# Altium PCB PCB_3.PcbDoc
Units mil, origin at the board's own origin, x right, y up, seen from the top; angles counter-clockwise.
Board outline 3445 x 3715 mil, 2 copper layers (Top Layer, Bottom Layer); 29 components, 23 nets, 136 pads, 1 vias.
Unrouted connection lines stored in the file: 3.
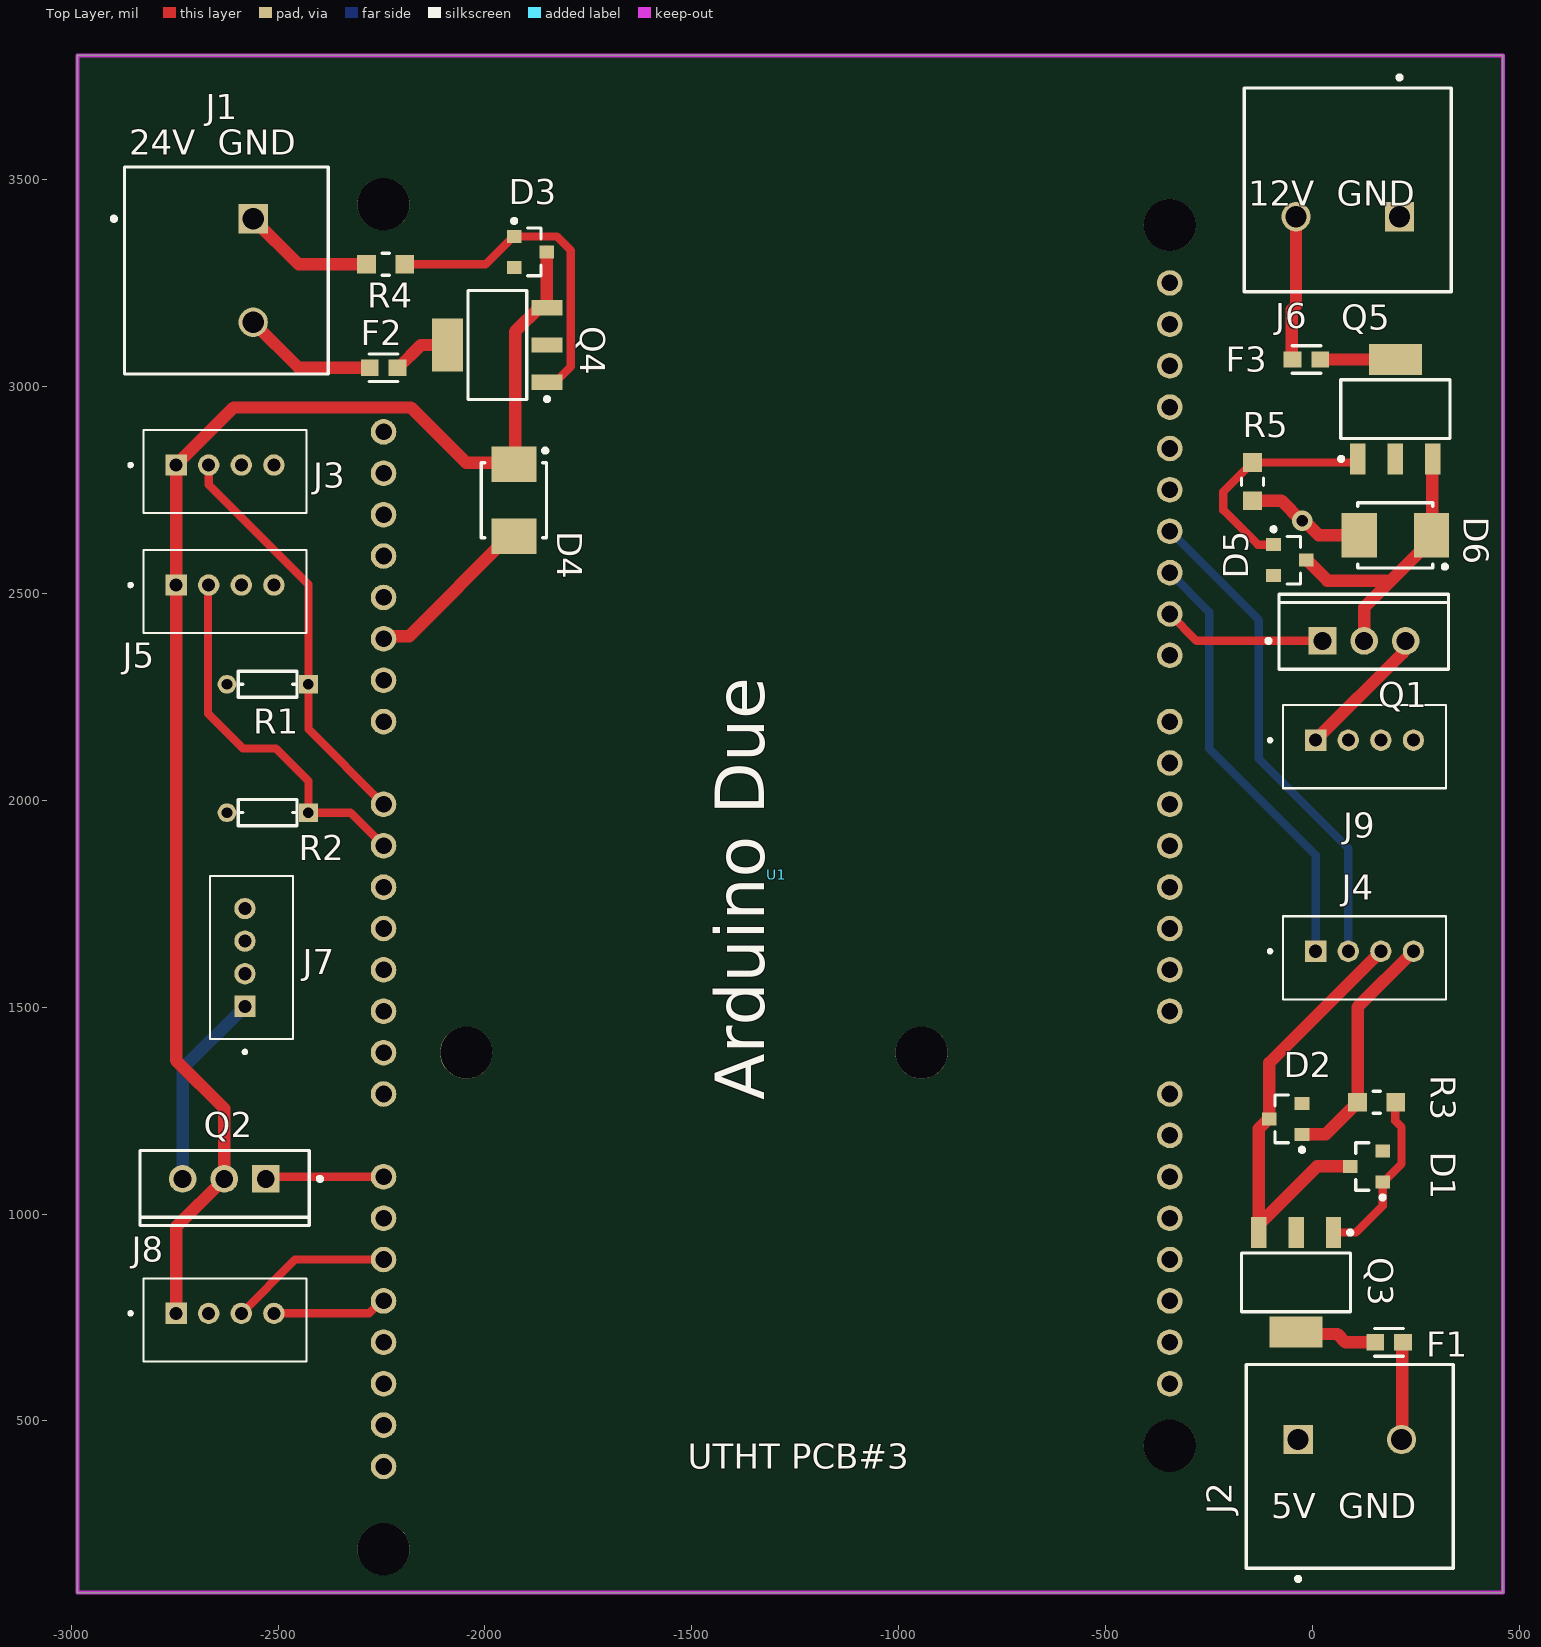
[diagram p0: Top Layer view]
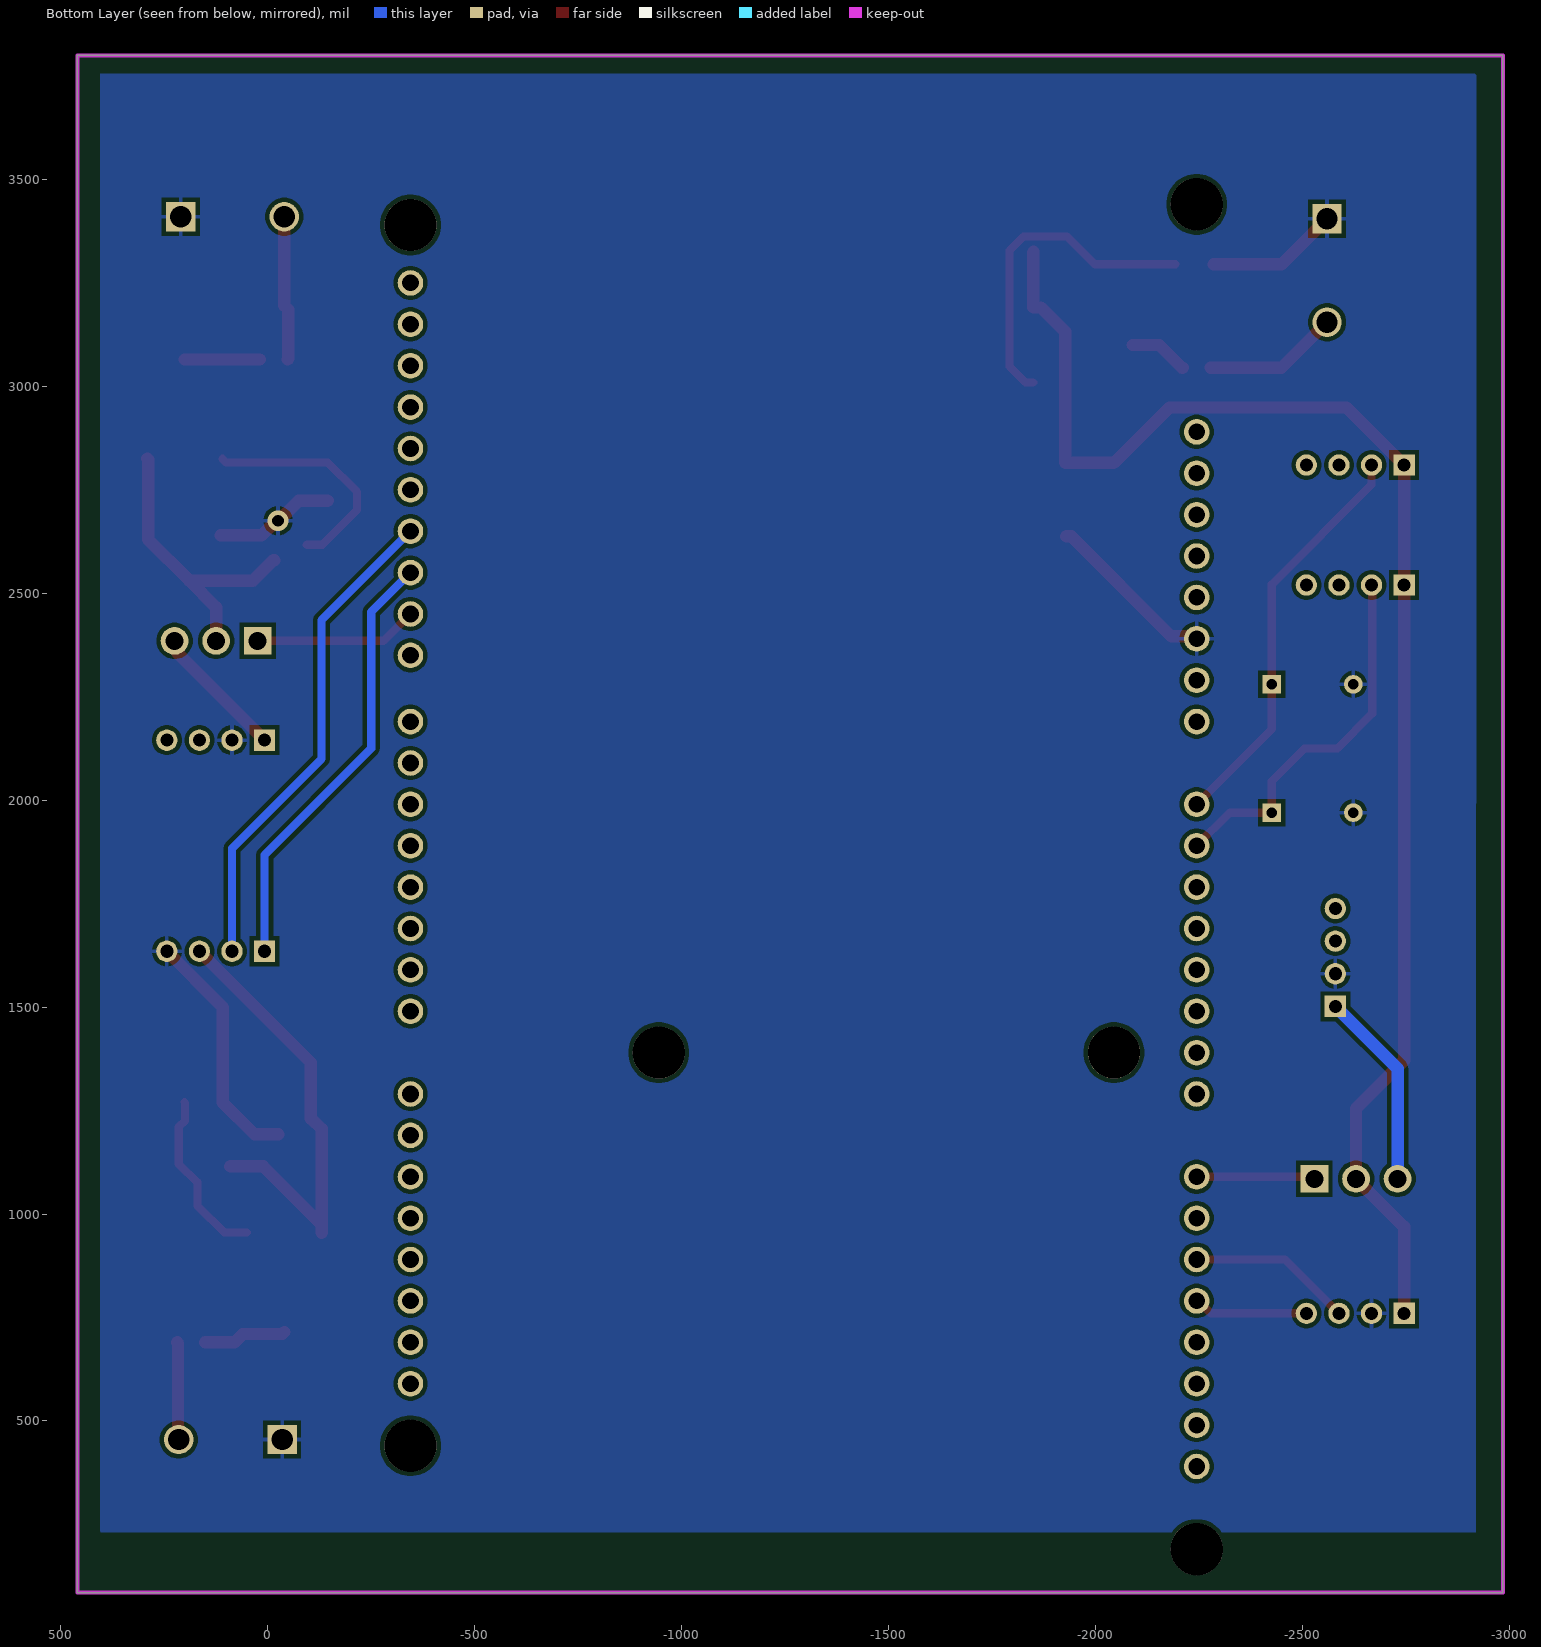
[diagram p1: Bottom Layer view, seen from below]

## Layer stack, top to bottom
Top Solder: solder mask 0.4, Solder Resist, Dk 3.5
Top Layer: signal copper 1.4
Dielectric 1: dielectric 12.6, FR-4, Dk 4.8
Bottom Layer: signal copper 1.4
Bottom Solder: solder mask 0.4, Solder Resist, Dk 3.5

## Board outline
-2985,85 460,85 460,3800 -2985,3800

## Design rules (kind name [scope] priority, off if disabled: settings)
Clearance [All] p1: gap=10 ignorepadtopadclearanceinfootprint=FALSE except(0: Arc-Hole Track-Hole SMDPad-Hole THPad-Hole Via-Hole Fill-Hole Poly-Hole Region-Hole Text-Hole; 12.99: Arc-THPad Track-THPad; 19.68: THPad-THPad)
PolygonConnect [All] p1: connectstyle=Relief reliefconductorwidth=10 reliefentries=4 polygonreliefangle="90 Angle" airgapwidth=10
RoutingVias [All] p1: holewidth=28 width=50 viastyle="Through Hole" minholewidth=28 minwidth=50 maxholewidth=28 maxwidth=50
SolderMaskExpansion [All] p1: expansion=4 istentingtop=FALSE
Width Width_Power [(InNet('5V') OR InNet('12V') OR InNet('24V') OR InNet('GND') OR InNet('NetJ7_1') OR InNet('NetJ8_1')) OR (InNet('NetF1_1') OR InNet('NetF1_2') OR InNet('NetF2_1') OR InNet('NetF2_2') OR InNet('NetF3_1') OR InNet('NetF3_2'))] p1: maxlimit=50 minlimit=30 preferedwidth=40
Width Width_1 [All] p2: maxlimit=23.62 minlimit=10 preferedwidth=10 minimp=50.000000 maximp=50.000000 favimp=50.000000
30 further rules are at their usual default settings.

## Classes and differential pairs
component class "Protection Circuit 5V": D1 D2 F1 Q3 R3
component class "Protection Circuit 12V": D1 D2 F1 Q4 R5
component class "Protection Circuit 24V": D1 D2 F1 M1 Q4 R5
component class PCB_3: J2 J3 J6 J8 J9 Q1 Q2 R2 U1

## Components (designator, comment, footprint, x,y, rotation, side; value= is the part's Value field where it differs from the comment)
D1 "Zener" ONSC-SOT-23-3-318-08_V 130,1115 r180 top
D2 "Zener" ONSC-SOT-23-3-318-08_V -65,1230 r180 top
D3 "Zener 1" ONSC-SOT-23-3-318-08_V -1890,3325 r0 top
D4 "Zener 2" ONSC-SMB-2-403A-03_H_V -1930,2725 r270 top
D5 "Zener" ONSC-SOT-23-3-318-08_V -55,2580 r0 top
D6 "Zener" ONSC-SMB-2-403A-03_H_V 200,2640 r180 top
F1 "1A Fuse" FP-0603SFS-MFG 185,690 r180 top value=0.2Ω
F2 "1A Fuse" FP-0603SFS-MFG -2245,3045 r0 top value=0.2Ω
F3 "1A Fuse" FP-0603SFS-MFG -15,3065 r0 top value=0.2Ω
J1 "Screw Conn." PHOE-1714955_V -2560,3280 r270 top
J2 "Screw Conn." PHOE-1714955_V 90,455 r0 top
J3 "4 Pin GROVE, RTD #1" SEEED_110990030 -2628.11,2520 r0 top
J4 "4 Pin GROVE, CAN" SEEED_110990030 125.63,1635 r0 top
J5 "4 Pin GROVE, RTD #2" SEEED_110990030 -2628.11,2810 r0 top
J6 "Screw Conn." PHOE-1714955_V 85,3410 r180 top
J7 "4 PIN GROVE, RELAY" SEEED_110990030 -2580,1620 r90 top
J8 "4 PIN GROVE, FLOW" SEEED_110990030 -2628.11,760 r0 top
J9 "4 PIN GROVE, SOL" SEEED_110990030 125.63,2145 r0 top
Q1 "STP80NF55-06" STM-TO-220A-3 124.61,2385 r90 top
Q2 "STP80NF55-06" STM-TO-220A-3 -2630,1085 r270 top
Q3 "PMOS" FAIR-SOT223-4_V -40,835 r270 top
Q4 "PMOS" FAIR-SOT223-4_V -1970,3100 r180 top
Q5 "PMOS" FAIR-SOT223-4_V 200,2945 r90 top
R1 "" FP-MBA0204-MFG -2525,2280 r180 top value=220Ω
R2 "" FP-MBA0204-MFG -2525,1970 r180 top value=220Ω
R3 "100 kOhm" FP-CR0805-MFG 155,1270 r0 top
R4 "100 kOhms" FP-CR0805-MFG -2240,3295 r0 top
R5 "100 kOhm" FP-CR0805-MFG -145,2770 r90 top
U1 "DUE_CONNECTOR" DUE_FOOTPRINT -2245,2890 r0 top

## Footprints (in the part's own frame and the unit in brackets; to place one, negate y for a bottom-side part, rotate by r counter-clockwise, add the part's x,y. Pads: shape width x height; smd on the part's side, far side on the other; paste and mask are expansions set on the pad)
DUE_FOOTPRINT [mm]
  round 1.57 hole 1.02: 0(0,0) 1(0,-2.54) 2(0,-5.08) 3(0,-7.62) 4(0,-10.16) 5(0,-12.7) 6(0,-15.24) 7(0,-17.78) 8(0,-22.86) 9(0,-25.4) 10(0,-27.94) 11(0,-30.48) 12(0,-33.02) 13(0,-35.56) 14(0,-38.1) 15(0,-40.64) 16(0,-45.72) 17(0,-48.26) 18(0,-50.8) 19(0,-53.34) 20(0,-55.88) 21(0,-58.42) 22(0,-60.96) 23(0,-63.5) 24(48.26,-58.42) 25(48.26,-55.88) 26(48.26,-53.34) 27(48.26,-50.8) 28(48.26,-48.26) 29(48.26,-45.72) 30(48.26,-43.18) 31(48.26,-40.64) 32(48.26,-35.56) 33(48.26,-33.02) 34(48.26,-30.48) 35(48.26,-27.94) 36(48.26,-25.4) 37(48.26,-22.86) 38(48.26,-20.32) 39(48.26,-17.78) 40(48.26,-13.716) 41(48.26,-11.176) 42(48.26,-8.636) 43(48.26,-6.096) 44(48.26,-3.556) 45(48.26,-1.016) 46(48.26,1.524) 47(48.26,4.064) 48(48.26,6.604) 49(48.26,9.144)
  body extent -1.27,-64.77 49.53,10.41, height 9.5
FAIR-SOT223-4_V [mm] "SOT223, 4-Leads, Body 6.7x3.7mm, Pitch 2.3mm"
  rect 1.9x0.95 smd: 1(-3.05,2.3) 2(-3.05,0) 3(-3.05,-2.3)
  rect 1.9x3.25 smd: 4(3.05,0)
  silkscreen extent -3.17,-3.35 1.8,3.45, body extent -3.5,-3.35 3.5,3.35, height 1.8
FP-0603SFS-MFG [mil]
  rect 43x39 smd paste+0 mask+0: 1(-33.5,0) 2(33.5,0)
  silkscreen extent -34,-33 34,33, body extent -59,-23 59,23, height 10
FP-CR0805-MFG [mm]
  rect 1.15x1.15 smd paste+0 mask+0: 1(-1.175,0) 2(1.175,0)
  silkscreen extent -0.23,-0.67 0.23,0.67, body extent -1.85,-0.77 1.85,0.77, height 0.25
FP-MBA0204-MFG [mm]
  rect 1.15x1.15 hole 0.65 paste-1000 mask+0: 1(-2.5,0)
  round 1.15 hole 0.65 paste-1000 mask+0: 2(2.5,0)
  silkscreen extent -1.8,-0.8 1.8,0.8, body extent -3.17,-0.9 3.17,0.9, height 0.25
ONSC-SMB-2-403A-03_H_V [mil] "Molded, 2-Leads, Body 4.6x3.95mm"
  rect 85x107.99 smd: 1(-87.01,0) 2(87.01,0)
  silkscreen extent -125,-79 91,81, body extent -91,-78 91,78, height 95
ONSC-SOT-23-3-318-08_V [mm] "SOT23, 3-Leads, Body 2.92x1.3mm, Pitch 0.95mm"
  rect 0.9x0.8 smd: 1(-1,0.95) 2(-1,-0.95) 3(1,0)
  silkscreen extent -1.13,-1.46 0.65,2.02, body extent -0.65,-1.46 0.65,1.46, height 1.11
PHOE-1714955_V [mm] "Terminal Block, 2-Leads, Body 12.7x12.5mm, Pitch 6.35mm"
  rect 1.8x1.8 hole 1.3: 1(-3.175,0)
  round 1.8 hole 1.3: 2(3.175,0)
  silkscreen extent -6.35,-8.67 6.35,4.6, body extent -6.92,-7.9 6.35,4.6, height 21.51
SEEED_110990030 [mm]
  rect 1.308x1.308 hole 0.8: 1(-3,0)
  round 1.308 hole 0.8: 2(-1,0) 3(1,0) 4(3,0)
  silkscreen extent -5.9,-2.95 5,2.15, body extent -5,-2.92 5,2.08, height 8
STM-TO-220A-3 [mm] "FM, 3-Leads, Body 10.4x4.6mm, Pitch 2.55mm"
  rect 1.7x1.7 hole 1.1: 1(0,2.55)
  round 1.7 hole 1.1: 2(0,0) 3(0,-2.55)
  silkscreen extent -1.74,-5.18 2.86,6, body extent -1.74,-5.18 2.86,5.23, height 19.68

## Part data
D1 D3 D5: library part CMP-1060-01182-1, "Zener Voltage Regulator, 225 mW, 3-Pin SOT-23, Pb-Free, Tape and Reel", Manufacturer="On Semiconductor", PartNumber=MMBZ5245BLT3G, ComponentLink1Description="Manufacturer URL", ComponentLink1URL=http://www.onsemi.com/, ComponentLink2Description=Datasheet, ComponentLink2URL=http://www.onsemi.cn/pub_link/Collateral/MMBZ5221BLT1-D.PDF, ComponentLink3Description="Package Specification", ComponentLink3URL=http://www.onsemi.cn/pub_link/Collateral/318-08.PDF, DatasheetVersion="Rev. 12", Mounting Technology="Surface Mount", PackageDescription="3-Pin Small Outline Transistor, Body 2.92 x 1.3 mm, Pitch 0.95 mm", PackageReference=SOT-23-3-318-08, PackageVersion="Rev. AP, 11/2009", Packing="Tape and Reel", RoHS=Pb-Free, VZ Typ (V)=15
D2: library part CMP-1060-01193-1, "Zener Voltage Regulator, 225 mW, 3-Pin SOT-23, Pb-Free, Tape and Reel", Manufacturer="On Semiconductor", PartNumber=SZBZX84C39ET1G, ComponentLink1Description="Manufacturer URL", ComponentLink1URL=http://www.onsemi.com/, ComponentLink2Description=Datasheet, ComponentLink2URL=http://www.onsemi.com/pub_link/Collateral/BZX84C2V4ET1-D.PDF, ComponentLink3Description="Package Specification", ComponentLink3URL=http://www.onsemi.cn/pub_link/Collateral/318-08.PDF, DatasheetVersion="Rev. 8", Mounting Technology="Surface Mount", PackageDescription="3-Pin Small Outline Transistor, Body 2.92 x 1.3 mm, Pitch 0.95 mm", PackageReference=SOT-23-3-318-08, PackageVersion="Rev. AP, 11/2009", Packing="Tape and Reel", RoHS=Pb-Free
D4: library part CMP-1060-00141-1, "3 W Zener Voltage Regulator, 2-Pin SMB, Pb-Free, Tape and Reel", Manufacturer="On Semiconductor", PartNumber=1SMB5934BT3G, ComponentLink1Description="Manufacturer URL", ComponentLink1URL=http://www.onsemi.com/, ComponentLink2Description=Datasheet, ComponentLink2URL=http://www.onsemi.com/pub_link/Collateral/1SMB5913BT3-D.PDF, ComponentLink3Description="Package Specification", ComponentLink3URL=http://www.onsemi.com/pub_link/Collateral/1SMB5913BT3-D.PDF, DatasheetVersion="Rev. 8", Mounting Technology="Surface Mount", PackageDescription="2-Pin Small Molded Package, J-Bend Lead, Body 4.33 x 3.625 mm", PackageReference=SMB-2-403A-03_H, PackageVersion="Rev. H, 05/2011", Packing="Tape and Reel", RoHS=Pb-Free, VZ Typ (V)=24
D6: library part CMP-1060-00215-1, "3 W Zener Voltage Regulator, 2-Pin SMB, Pb-Free, Tape and Reel", Manufacturer="On Semiconductor", PartNumber=1SMB5927BT3G, ComponentLink1Description="Manufacturer URL", ComponentLink1URL=http://www.onsemi.com/, ComponentLink2Description=Datasheet, ComponentLink2URL=http://www.onsemi.com/pub_link/Collateral/1SMB5913BT3-D.PDF, ComponentLink3Description="Package Specification", ComponentLink3URL=http://www.onsemi.com/pub_link/Collateral/1SMB5913BT3-D.PDF, DatasheetVersion="Rev. 8", Mounting Technology="Surface Mount", PackageDescription="2-Pin Small Molded Package, J-Bend Lead, Body 4.33 x 3.625 mm", PackageReference=SMB-2-403A-03_H, PackageVersion="Rev. H, 05/2011", Packing="Tape and Reel", RoHS=Pb-Free, VZ Typ (V)=12
F1 F2 F3: library part CMP-08605-000034-1, "FUSE BOARD MOUNT 1A 32VDC 0603", Fuse Current=1A, Fuse Interrupt Dc Current=50A, Manufacturer=Littelfuse, Manufacturer Part Number=0603SFS100F/32-2, Max Fuse Dc Voltage=32V, Package=0603SFS, Resistance=0.2Ω, Temperature="-55°C to +125°C", Temperature Range High=+125°C, Temperature Range Low=-55°C, Automotive=No, Category=Fuse, ComponentLink2Description=Datasheet, ComponentLink2URL=https://www.littelfuse.com/~/media/electronics/datasheets/fuses/littelfuse_fuse_sfs_datasheet.pdf.pdf, Device Class L1="Circuit Protection", Device Class L2=Fuses, Device Class L3=unset, Digikey Description="FUSE BOARD MOUNT 1A 32VDC 0603", Fuse Blow Speed=Slow, Fuse I2T=0.093A2Sec, Height=0.95mm, Ipc Land Pattern Name=CAPC16080X80, Lead Free=Yes, Octopart=https://octopart.com/0603sfs100f%2F32-2-littelfuse-74214378, RoHS=TRUE, Voltage Rating=32V
J1 J2 J6: library part CMP-2000-05797-1, "PC Terminal Block, Pitch 6.35 mm, 1 x 2 Position, Height 21.5 mm, Tail Lenght 5.1 mm, RoHS, Bulk", Manufacturer="Phoenix Contact", Package Description="PC Terminal Block, Pitch 6.35 mm, 1 x 2 Position, Height 21.5 mm, Tail Lenght 5.1 mm", Package Reference=1714955, Datasheet URL=http://media.digikey.com/pdf/Data%20Sheets/Phoenix%20Contact%20PDFs/1714955.pdf, Datasheet Version=02/2010, Manufacturer URL=http://www.phoenixcontact.com/, Mounting Technology=ThroughHole
J3 J4 J5 J7 J8 J9: library part 110990030, "GROVE 2MM 4PIN VERT CONN 10PCS", Package=None, Arrow_Electronics-Purchase-URL=https://snapeda.com/shop?store=Arrow+Electronics&id=583576, Availability=Good, MF="Seeed Technology", Mouser-Purchase-URL=https://snapeda.com/shop?store=Mouser&id=583576, MP=110990030, Price=None, SnapEDA_Link=https://www.snapeda.com/parts/110990030/Seeed%20Technology%20Co.,%20Ltd/view-part/583576/?ref=snap
Q1 Q2: library part CMP-2000-07168-1, "N-Channel STripFET(TM) II Power MOSFET, 55 V, 80 A, 5 mOhm, -55 to 175 degC, 3-Pin TO-220, RoHS, Tube", Manufacturer=STMicroelectronics, Maximum Continuous Drain Current=80A, Maximum Drain Source Resistance=0.007Ω, Maximum Drain Source Voltage=55V, Maximum Gate Source Voltage=±20V, Maximum Gate Threshold Voltage=4V, Maximum Operating Temperature=+175°C, Maximum Power Dissipation=300W, Minimum Gate Threshold Voltage=2V, Minimum Operating Temperature=-55°C, Package Description="3-Pin Transistor Outline Package, 10.2 x 4.5 mm, Pitch 2.55 mm", Package Reference=TO-220, Typical Input Capacitance @ Vds=4400pF@25V, Category=PowerMOSFET, Channel Mode=Enhancement, Channel Type=N, Datasheet URL=http://www.st.com/content/ccc/resource/technical/document/datasheet/f1/46/49/9e/39/8f/49/aa/CD00002670.pdf/files/CD00002670.pdf/jcr:content/translations/en.CD00002670.pdf, Datasheet Version="Rev. 8, 10/2006", Dimensions=10.4x4.6x9.15mm, Height=9.15mm, Length=10.4mm, Manufacturer URL=http://www.st.com/, Mounting Technology=ThroughHole, Mounting Type=ThroughHole, Number of Elements per Chip=1, Package Type=TO-220, Package URL=http://www.st.com/st-web-ui/static/active/en/resource/technical/document/datasheet/CD00000544.pdf, Pin Count=3, Transistor Configuration=Single, Transistor Material=Si, Typical Gate Charge @ Vgs=142nC@10V, Typical Turn-Off Delay Time=125ns, Typical Turn-On Delay Time=27ns, Width=4.6mm
Q3 Q4 Q5: library part CMP-2000-06838-1, "P-Channel Enhancement Mode Field Effect Transistor, 60 V, 2.5 A, -55 to 150 degC, 4-Pin SOT223, RoHS, Tape and Reel", Drain-Source On Resistance-Max=300mO, Drain-to-Source Voltage [Vdss]=60V, Manufacturer="Fairchild Semiconductor", Package Description="4-Pin Small Outline Transistor, Body 6.45 x 3.5 mm, Pitch 2.3 mm", Package Reference=SOT223-4, Package Version="Rev. 3, 07/2016", Rated Power Dissipation=3W, Channel Type=P-Channel, Datasheet URL=http://www.mouser.com/ds/2/149/NDT2955-116189.pdf, Datasheet Version="Rev. 1.4, 04/2015", Manufacturer URL=https://www.fairchildsemi.com/, Mounting Technology=SurfaceMount, Package URL=https://www.fairchildsemi.com.cn/package-drawings/MA/MA04A.pdf, Qg Gate Charge=15nC
R1 R2: library part CMP-02408-000005-1, "RES 220 OHM 0.4W 1% AXIAL", Manufacturer="Vishay BC Components", Manufacturer Part Number=MBA02040C2200FC100, Package=MBA0204, Power Rating=0.25W, Resistance=220Ω, Temperature="-55°C to +125°C", Temperature Coefficient=50ppm/°C, Temperature Range High=+125°C, Temperature Range Low=-55°C, Tolerance=1%, Voltage Rating=200V, Automotive=Yes, Automotive Grade="Grade 1", Category=Res, ComponentLink2Description=Datasheet, ComponentLink2URL=http://www.vishay.com/docs/28766/mbxsma.pdf, Composition="Metal Film", Device Class L1="Passive Components", Device Class L2=Resistors, Device Class L3="Through-Hole Resistors", Digikey Description="RES 220 OHM 0.4W 1% AXIAL", Height=1.6mm, Ipc Land Pattern Name=RESAD500W65L360D160, Lead Free=Yes, Mouser Description="Thin Film Resistors - Through Hole .4watt 220ohms 1% 1/8watt body size", Octopart=https://octopart.com/mba02040c2200fc100-vishay-43743094, RoHS=TRUE, Series="MBA/SMA 0204"
R3 R4 R5: library part CMP-07231-001707-1, "Thick Film Chip Resistors 0805 100kΩ 0.125W 5% 200ppm/°C", Case Code (Imperial)=0805, Case Code (Metric)=2012, Max Operating Temperature=155°C, Max Power Dissipation=125mW, Min Operating Temperature=-55°C, Package Quantity=10000, Resistance=100kR, Temperature Coefficient=200ppm/°C, Tolerance=5%, Voltage Rating=150V, Case/Package=0805, Composition="Thick Film", Contact Plating=Tin, Depth=1.25mm, Features="Moisture Resistant", Height=0.024inch, Length=0.079inch, Military Standard=Not, Mount="Surface Mount", Number of Terminations=2, Packaging="Tape and Reel", Power Rating=125mW, Radiation Hardening=No, Termination=SMD/SMT, Thickness=508um, Width=0.049inch

## Free pads (board coordinates)
  round 125.98 hole 125.98 unplated: MH1(-2245,190) MH2(-345,3390) MH3(-345,440) MH4(-2245,3440) MH5(-945,1390) MH6(-2045,1390)

## Via types
v1: diameter 50, hole 28, Top Layer to Bottom Layer, 1 vias

## Nets (pads, with @x,y where several pads share a name; then routed paths per layer and width w, separated by ;. In a path a pad name is that pad's centre, name@x,y a point inside that pad or via, vN(x,y) a via of type N, cw(c..) or ccw(c..) an arc to the next point about the centre after c; other vN are vias at no path point)
5V: D1.3 D2.3 J4.3 Q3.3 | length 1083.2
  Top Layer w30: Q3.3 Q3.3@-130.55,973.78 ; D1.3 10.67,1115 Q3.3@-130.55,973.78 ; J4.3 -104.37,1365.63 D2.3 -106.34,1230 -130.55,1205.79 Q3.3@-130.55,973.78
12V: D5.3 D6.1 Q1.2 Q5.3 | length 733.9
  Top Layer w30: D5.3 -13.66,2580 35.59,2530.75 189.25,2530.75 ; Q1.2 124.61,2466.1 189.25,2530.75 ; Q5.3 288.78,2823.15 288.78,2630.28 189.25,2530.75
24V: D3.3 D4.1 J3.1 J5.1 J8.1 Q2.2 Q4.3 | length 3631.7
  Top Layer w30: J8.1 -2746.22,968.78 Q2.2 -2630,1255 -2746.22,1371.22 J3.1 J5.1 -2607.32,2948.9 -2178.9,2948.9 -2045,2815 -1927.01,2815 -1927.01,3132.17 -1868.62,3190.55 Q4.3 -1850.28,3190.91 -1850.28,3324.65 D3.3
GND: D2.1 D4.2 D6.2 J1.1 J2.1 J4.4 J6.1 J7.2 J8.2 J9.2 R1.2 R2.2 R3.1 R4.1 R5.1 U1.5 | length 1617.1
  Top Layer w30: J1.1 -2450,3295 R4.1 ; U1.5 -2238.91,2396.09 -2183.4,2396.09 -1941.5,2637.99 D4.2 ; R5.1 -75.25,2723.74 -26.51,2675 v1(-25,2675) -19.59,2675 15.41,2640 D6.2 ; D2.1 31.34,1192.6 R3.1 108.74,1500 J4.4
NetD1_1: D1.1 Q3.1 R3.2 | length 422.8
  Top Layer w20: Q3.1 104.92,955.08 169.37,1019.53 D1.1 171.34,1077.6 215,1121.26 215,1210 200,1225 200,1268.74 R3.2
NetD3_1: D3.1 Q4.1 R4.2 | length 797
  Top Layer w20: R4.2 -1998.74,3295 -1931.34,3362.4 D3.1 -1826.28,3362.4 -1792.52,3328.64 -1792.52,3048.15 -1831.22,3009.45 Q4.1
NetD5_1: D5.1 Q5.1 R5.2 | length 558.8
  Top Layer w20: D5.1 -132.4,2617.4 -215.86,2700.86 -215.86,2745.4 R5.2 100.79,2816.26 Q5.1
NetF1_1: F1.1 J2.2 | length 236.4
  Top Layer w30: J2.2 216.75,456.75 216.75,688.25 F1.1
NetF1_2: F1.2 Q3.2 Q3.4 | length 201.8
  Top Layer w30: Q3.4 -35.08,710 60,710 80,690 F1.2
NetF2_1: F2.1 J1.2 | length 327.1
  Top Layer w30: J1.2 -2450,3045 F2.1
NetF2_2: F2.2 Q4.2 Q4.4 | length 144.2
  Top Layer w30: F2.2 -2209.5,3045 -2154.5,3100 Q4.4
NetF3_1: F3.1 J6.2 | length 349.8
  Top Layer w30: F3.1 -50,3066.5 -50,3185 -40,3195 J6.2
NetF3_2: F3.2 Q5.2 Q5.4 | length 181.5
  Top Layer w30: F3.2 F3.2 199.96,3065.04 Q5.4
NetJ4_1: J4.1 U1.42 | length 1061
  Bottom Layer w20: U1.42 -250,2455 -250,2125 7.52,1867.48 J4.1
NetJ4_2: J4.2 U1.43 | length 1193.6
  Bottom Layer w20: U1.43 -130,2435 -130,2100 86.26,1883.74 J4.2
NetJ7_1: J7.1 Q2.3 | length 479.2
  Bottom Layer w30: Q2.3 -2730.39,1351.5 J7.1
NetJ8_3: J8.3 U1.18 | length 397.6
  Top Layer w20: J8.3 -2458.74,890 U1.18
NetJ8_4: J8.4 U1.19 | length 277.4
  Top Layer w20: J8.4 -2279.92,760 -2249.92,790 U1.19
NetJ9_1: J9.1 Q1.3 | length 333.6
  Top Layer w30: J9.1@5,2147.52 J9.1 217.93,2355.41 217.93,2377.93 Q1.3
NetQ1_1: Q1.1 U1.41 | length 396.1
  Top Layer w20: U1.41 -280,2385 Q1.1
NetQ2_1: Q2.1 U1.16 | length 286.7
  Top Layer w10: Q2.1 Q2.1@-2524.61,1090
  Top Layer w20: Q2.1@-2524.61,1090 U1.16
OUT_1: J5.2 R1.1 U1.8 | length 995
  Top Layer w20: J5.2 -2667.48,2762.48 -2426.57,2521.57 R1.1 -2426.57,2171.57 U1.8
OUT_2: J3.2 R2.1 U1.9 | length 912.7
  Top Layer w20: J3.2 -2669.06,2518.43 -2669.06,2209.06 -2585,2125 -2505,2125 -2426.57,2046.57 R2.1 -2325,1970 U1.9
pads on no net: D1.2 D2.2 D3.2 D5.2 J3.3 J3.4 J5.3 J5.4 J7.3 J7.4 J9.3 J9.4 U1.0 U1.1 U1.2 U1.3 U1.4 U1.6 U1.7 U1.10 U1.11 U1.12 U1.13 U1.14 U1.15 U1.17 U1.20 U1.21 U1.22 U1.23 U1.24 U1.25 U1.26 U1.27 U1.28 U1.29 U1.30 U1.31 U1.32 U1.33 U1.34 U1.35 U1.36 U1.37 U1.38 U1.39 U1.40 U1.44 U1.45 U1.46 U1.47 U1.48 U1.49

## Polygon pours and split planes (outlines as drawn)
GND on Bottom Layer "GND_L02_P000" (solid, pour order 0): -2920.08,3755 405,3755 405,235 403.95,231.05 -2919.09,231.05

## Keep-outs
Keep-Out Layer:
  the board outline again, w10

## Silkscreen, mask and mechanical layers (free items; w line width, h text height)
Top Overlay:
  text "24V  GND" at -2860,3560 h60
  text "12V  GND" at -154.99,3436.02 h60
  text "Arduino Due" at -1325,1275 h120 r90
  text "UTHT PCB#3" at -1510,385 h60
  text "5V  GND" at -100,265 h60